# EAGLE board LCD_Display (EAGLE 6.5.0)
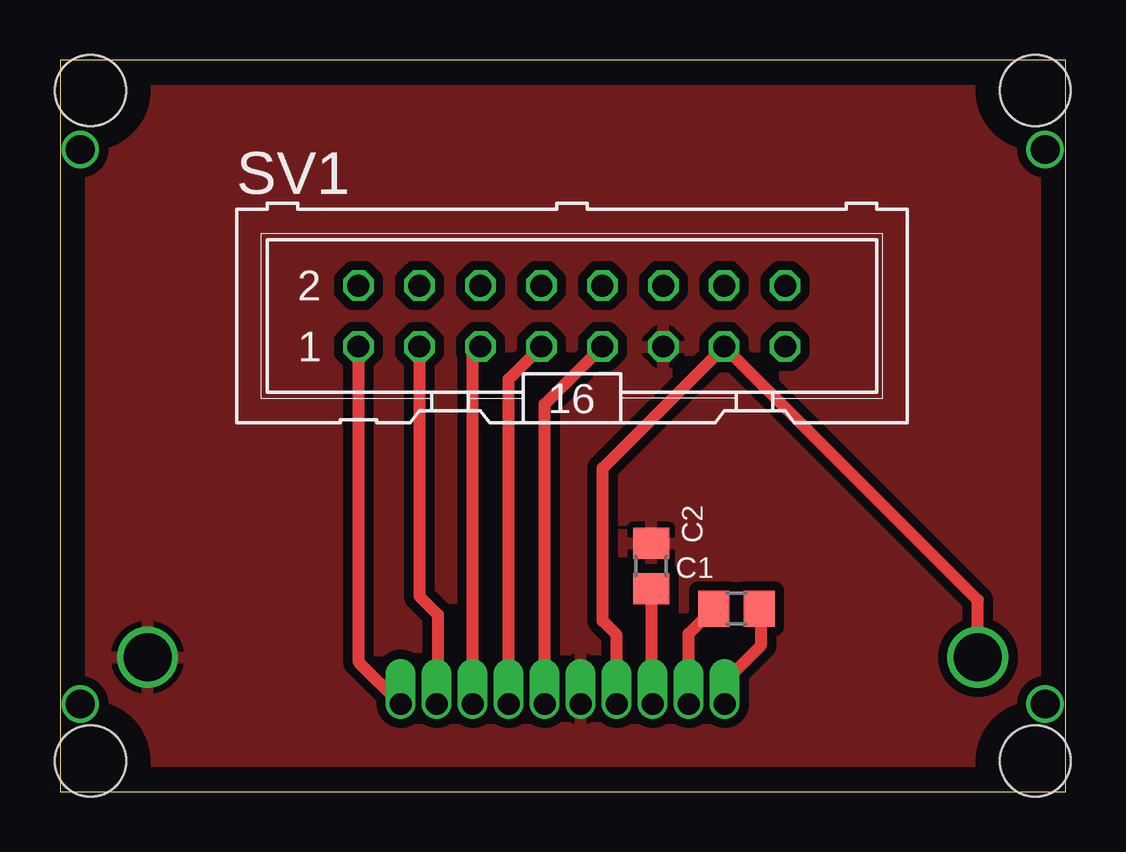
[diagram p0: board, top side]
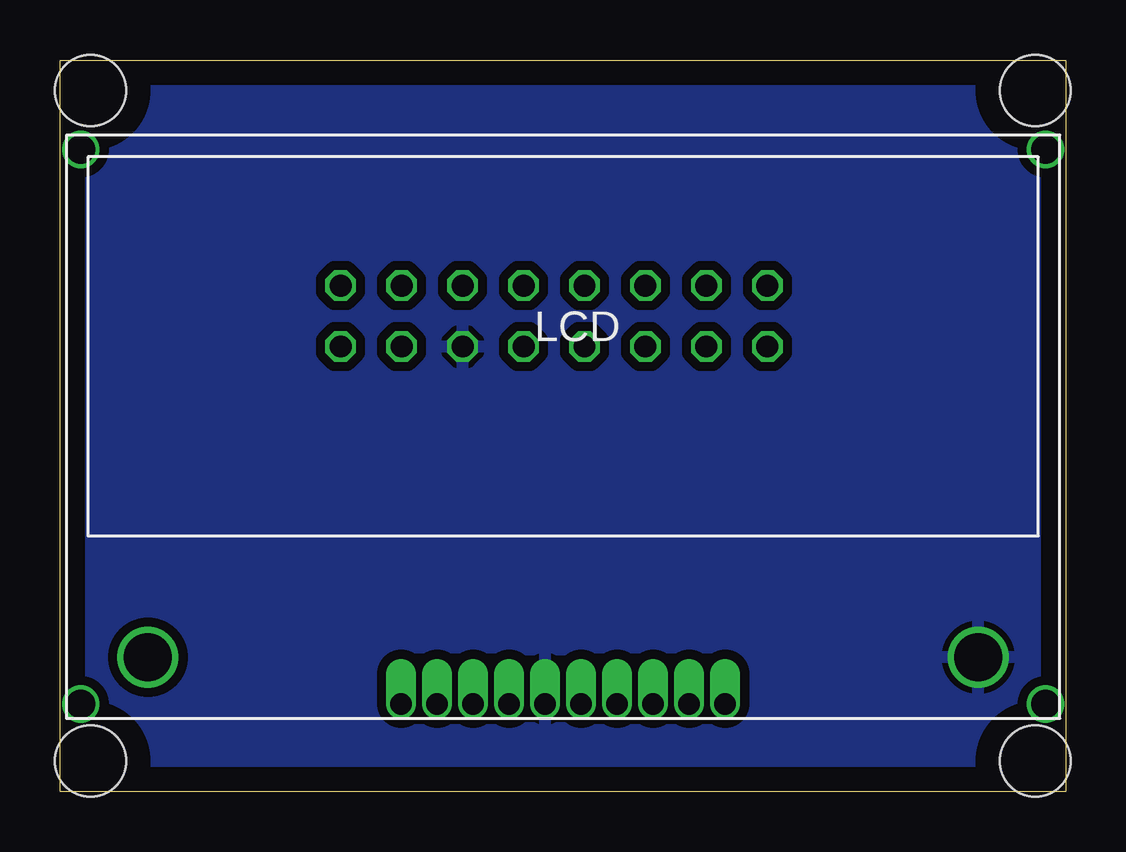
[diagram p1: board, bottom side, seen from below]

Size 41.91 x 30.48 mm. Coordinates in mm from the lower left corner, seen from the top.
Outline: 0,0 41.91,0 41.91,30.48 0,30.48 0,0
Copper layers (1*16): Top 0.035mm / dielectric 1.5mm / Bottom 0.035mm
Design rules "default *": minimum track width 10mil, minimum drill 24mil, track to track 8mil, track to pad 8mil, pad to pad 8mil, via to via 8mil, smd to smd 8mil, copper to edge 40mil, drill to drill 8mil, minimum pad ring 7mil, minimum via ring 8mil, stop-mask expansion 4mil, vias tented up to drill 0mil, thermal gap 10mil
Holes 2.95 mm at 1.27,29.21 1.27,1.27 40.64,29.21 40.64,1.27

## Footprints (pad centres in the part's own frame; a part is rotated, then mirrored left to right if it is on the bottom)
0805 = smd 1.3 x 1.5: 1 -0.95,0; 2 0.95,0
ML16 = drill 0.914 octagon: 1 -8.89,-1.27; 2 -8.89,1.27; 3 -6.35,-1.27; 4 -6.35,1.27; 5 -3.81,-1.27; 6 -3.81,1.27; 7 -1.27,-1.27; 8 -1.27,1.27; 9 1.27,-1.27; 10 1.27,1.27; 11 3.81,-1.27; 12 3.81,1.27; 13 6.35,-1.27; 14 6.35,1.27; 15 8.89,-1.27; 16 8.89,1.27
NEWHAVEN_LCD = drill 0.9 pad 1.2 offset: 1 27.45,0.6; 2 25.95,0.6; 3 24.45,0.6; 4 22.95,0.6; 5 21.45,0.6; 6 19.95,0.6; 7 18.45,0.6; 8 16.95,0.6; 9 15.45,0.6; 10 13.95,0.6 | drill 2 pad 2.54: A 3.4,2.55; K 38,2.55 | drill 1.2: MOUNT$1 0.6,0.6; MOUNT$2 40.8,0.6; MOUNT$3 40.8,23.7; MOUNT$4 0.6,23.7

## Placement (x,y rotation side)
C1  1uF  [0805]  28.18,7.62 0 top
C2  1uF  [0805]  24.63,9.4 270 top
SV1  Ribbon Header  [ML16]  21.33,19.81 0 top
U1  NEWHAVEN_LCD  [NEWHAVEN_LCD]  41.65,3.05 0 bottom

## Library data of the parts
C1 C2 = rlc-jqi; PARTNO: 1276-2396-1-ND
SV1 = mcu-accessories; OC_FARNELL: unknown; OC_NEWARK: unknown; PARTNO: S9171-ND
U1 = mcu-accessories; PARTNUM: NHD-C0216CZ-FSW-FBW-3V3-ND

## Nets
CSB: SV1.5 U1.3
GND: C2.1 SV1.11 U1.6 U1.K
N$1: C1.1 U1.9
N$2: C1.2 U1.10
N$3: C2.2 U1.8
RS: SV1.3 U1.2
RST: SV1.1 U1.1
SCL: SV1.7 U1.4
SI: SV1.9 U1.5
VDD: SV1.13 U1.7 U1.A

## Tracks (layer width: path | path; a pad name or v marks a point on that pad's centre or on a via)
CSB
  Top 0.508: U1.3 17.2,18.22 SV1.5
GND
  pour Top (isolate 0.381): 0,0 41.91,0 41.91,30.48 0,30.48
  pour Bottom (isolate 0.381): 0,30.48 41.91,30.48 41.91,0 0,0
N$1
  Top 0.508: U1.9 26.2,6.58 C1.1
N$2
  Top 0.508: U1.10 27.7,4.58 29.21,6.1 29.21,7.54 C1.2
N$3
  Top 0.508: C2.2 24.63,3.72 U1.8
RS
  Top 0.508: SV1.3 14.98,8.14 15.75,7.37 15.75,3.7 U1.2
RST
  Top 0.508: SV1.1 12.44,5.41 U1.1
SCL
  Top 0.508: U1.4 18.7,17.18 SV1.7
SI
  Top 0.508: U1.5 20.2,16.14 SV1.9
VDD
  Top 0.508: U1.7 23.2,6.52 22.61,7.11 22.61,13.47 SV1.13 38.25,7.97 U1.A

## Text on the board
Document: Sized for Eurocard unit